# Altium PCB 如意硬件WIFI模块0831.PcbDoc
Units mm, origin at the board's own origin, x right, y up, seen from the top; angles counter-clockwise.
Board outline 47 x 49 mm, 2 copper layers (Top Layer, Bottom Layer); 25 components, 18 nets, 125 pads, 17 vias.
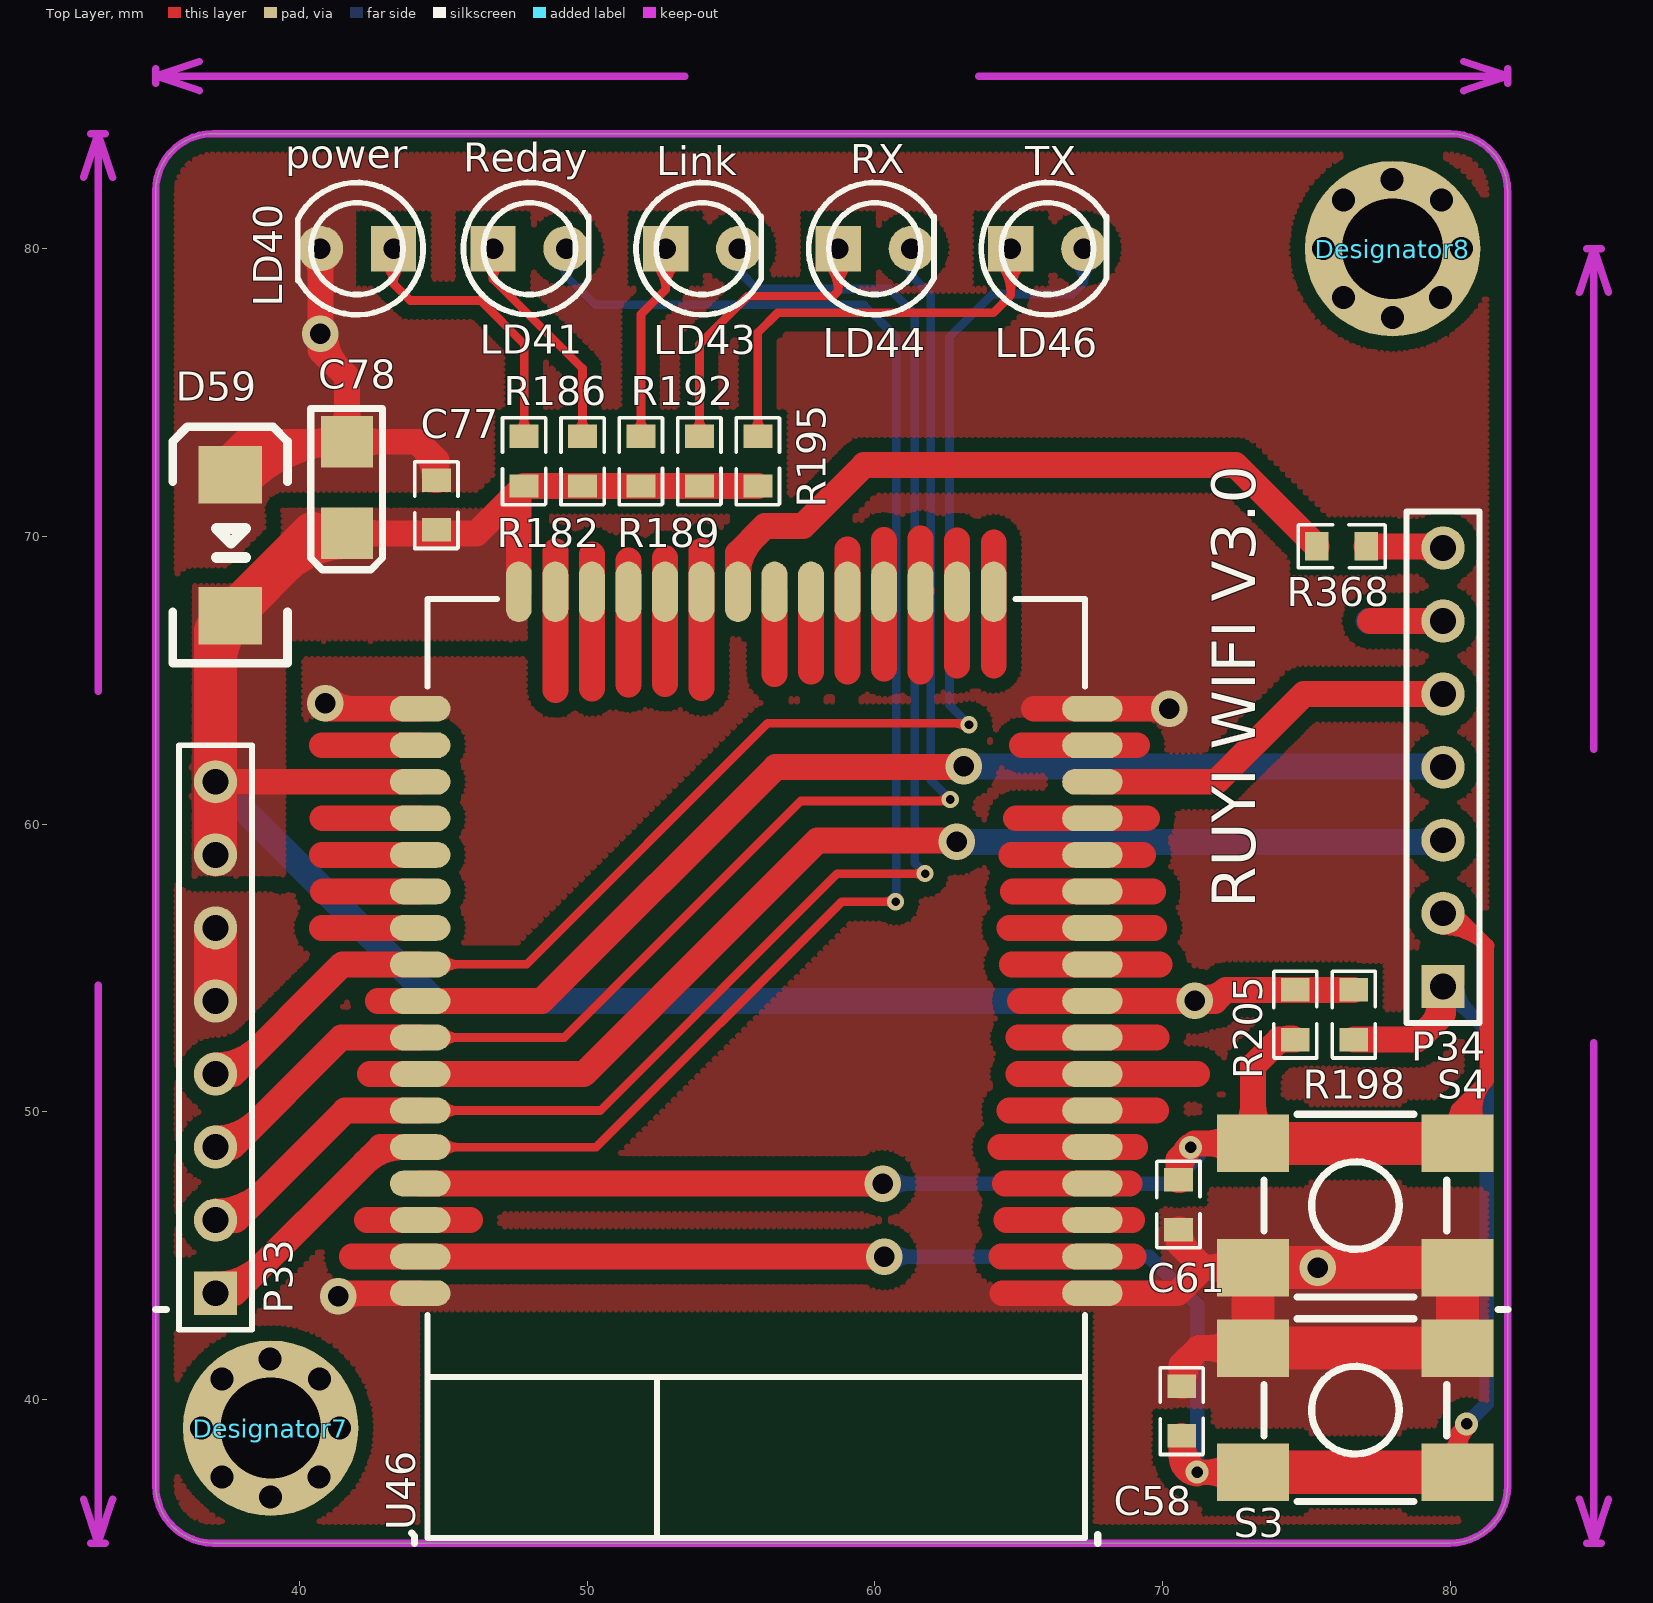
[diagram p0: Top Layer view]
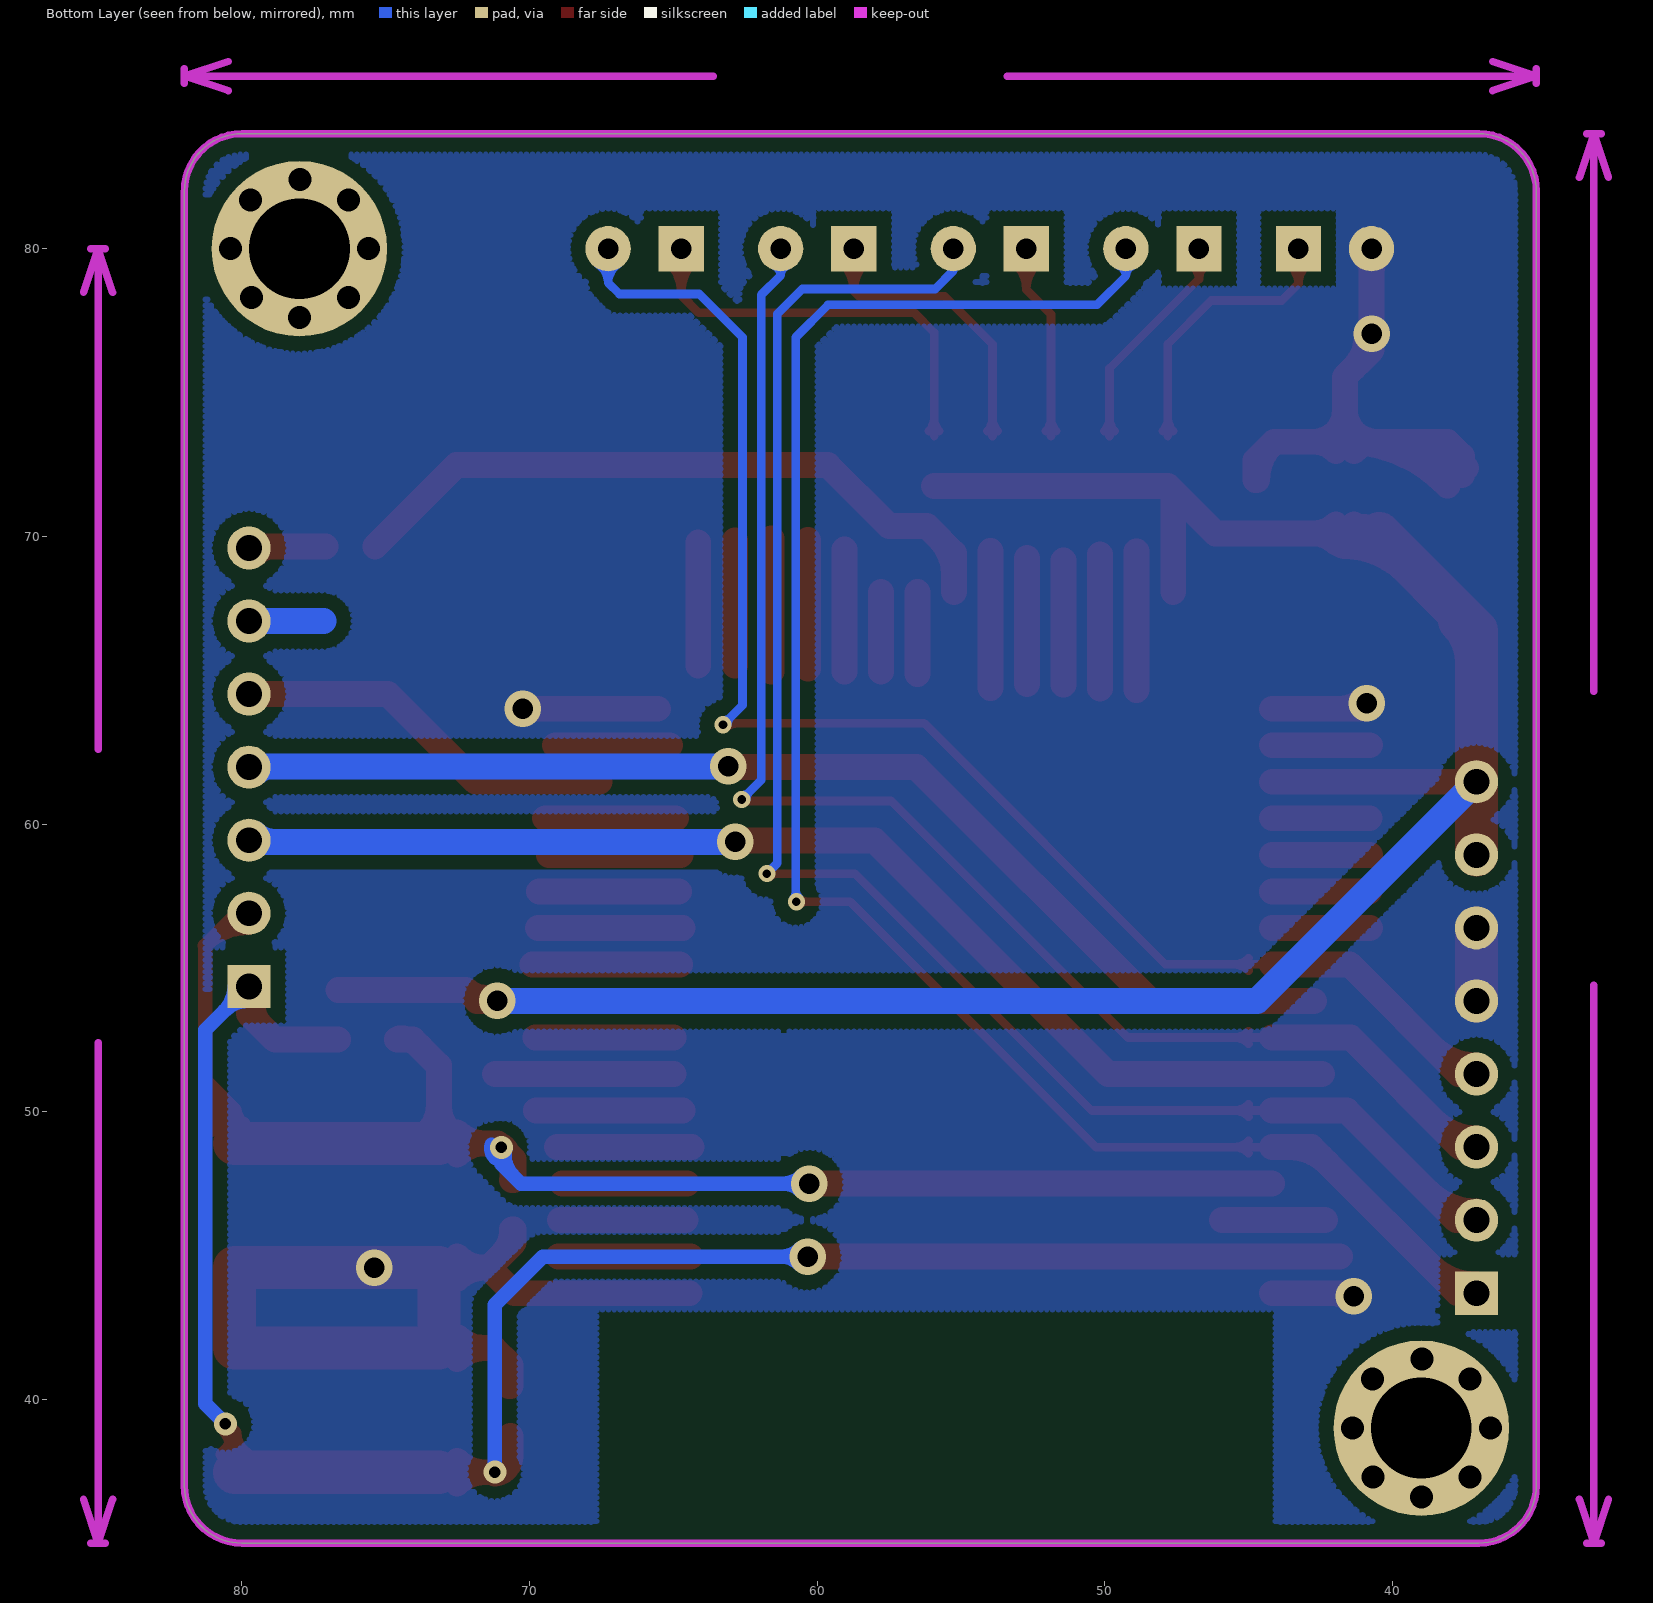
[diagram p1: Bottom Layer view, seen from below]

## Layer stack, top to bottom
Top Layer: signal copper 0.0356
Dielectric: dielectric 0.32, FR-4, Dk 4.8
Bottom Layer: signal copper 0.0356

## Board outline
37,35 cw(c37,37) 35,37 35,82 cw(c37,82) 37,84 80,84 cw(c80,82) 82,82 82,37 cw(c80,37) 80,35

## Design rules (kind name [scope] priority, off if disabled: settings)
Clearance Clearance_1 [InPolygon] p1: gap=0.5
Clearance [All] p2: gap=0.254
ComponentClearance [All] p1: gap=0 collisioncheckmode=3 verticalgap=0 showdistances=FALSE
FabricationTestpoint [(IsPad And (OnTopLayer Or OnBottomLayer))] p1: side=3 testpointundercomponent=TRUE minsize=1.016 maxsize=2.54 preferedsize=1.524 minholesize=0 maxholesize=1.016 preferedholesize=0.813 testpointgrid=0.025 allowsidetop=TRUE allowsidebottom=TRUE usegrid=TRUE gridtolerance=0
PolygonConnect PolygonConnect_1 [IsVia Or IsSMTPin Or IsThruPin vs IsPoly] p1: connectstyle=Direct reliefconductorwidth=0.254 reliefentries=4 polygonreliefangle="90 Angle"
PolygonConnect [All] p2: connectstyle=Relief reliefconductorwidth=0.254 reliefentries=4 polygonreliefangle="90 Angle"
RoutingVias [All] p1: holewidth=0.711 width=1.27 viastyle="Through Hole" minholewidth=0.2 minwidth=0.4 maxholewidth=0.711 maxwidth=1.27
SilkToSilkClearance [All] p1: silktosilkclearance=0
SilkscreenOverComponentPads [All] p1: minsilkscreentomaskgap=0
SolderMaskExpansion [All] p1: expansion=0.102
Width [All] p1: maxlimit=1.5 minlimit=0.3 preferedwidth=0.9
24 further rules are at their usual default settings.

## Components (designator, comment, footprint, x,y, rotation, side; value= is the part's Value field where it differs from the comment)
C58 "0.1uf" 0603C-1 70.612,39.624 r90 top
C61 "0.1uf" 0603C-1 70.612,46.736 r270 top
C77 "1uf" 0603C-1 44.704,71.12 r90 top
C78 "47uf/6.3V" 1206D-S 41.656,70.104 r180 top
D59 "SMAJ5A" SMB 37.592,72.136 r90 top
Designator7 "Comment" Hole-3MM 39,39 r0 top
Designator8 "Comment" Hole-3MM 78,80 r0 top
LD40 "LED" LED_Z1 42,80 r0 top
LD41 "LED" LED_Z1 48,80 r180 top
LD43 "LED" LED_Z1 54,80 r180 top
LD44 "LED" LED_Z1 60,80 r180 top
LD46 "LED" LED_Z1 66,80 r180 top
P33 "Header 8" HDR1X8 37.084,43.688 r90 top
P34 "Header 7" HDR1X7 79.756,54.356 r90 top
R182 "510" 0603R-1 47.752,72.644 r90 top
R186 "510" 0603R-1 49.784,72.644 r90 top
R189 "510" 0603R-1 51.816,72.644 r90 top
R192 "510" 0603R-1 53.848,72.644 r90 top
R195 "510" 0603R-1 55.88,72.644 r90 top
R198 "10K" 0603R-1 76.708,53.34 r270 top
R205 "10K" 0603R-1 74.676,53.34 r270 top
R368 "0" 0603R-1 76.2,69.596 r180 top
S3 "SW-PB" SW_PB4_A1 76.708,39.624 r0 top
S4 "SW-PB" SW_PB4_A1 76.708,46.736 r180 top
U46 "WIFI232-G2" USR-WIFI232-G2 67.564,43.688 r180 top

## Footprints (in the part's own frame and the unit in brackets; to place one, negate y for a bottom-side part, rotate by r counter-clockwise, add the part's x,y. Pads: shape width x height; smd on the part's side, far side on the other; paste and mask are expansions set on the pad)
0603C-1 [mm]
  rect 0.813x1 smd: 1(-0.892,-0.057) 2(0.835,-0.057)
  silkscreen extent -1.54,-0.81 1.47,0.69
0603R-1 [mm]
  rect 0.813x1 smd: 1(-0.892,-0.057) 2(0.835,-0.057)
  silkscreen extent -1.54,-0.81 1.47,0.69
1206D-S [mm]
  rect 1.8x1.8 smd: 1(0,0) 2(0,-3.186)
  silkscreen extent -1.23,-4.34 1.27,1.26
HDR1X7 [mm] "Connector; Header; 7 Position"
  rect 1.5x1.5 hole 0.9: 1(0,0)
  round 1.5 hole 0.9: 2(2.54,0) 3(5.08,0) 4(7.62,0) 5(10.16,0) 6(12.7,0) 7(15.24,0)
  silkscreen extent -1.27,-1.27 16.51,1.27
HDR1X8 [mm] "Connector; Header; 8 Position"
  rect 1.5x1.5 hole 0.9: 1(0,0)
  round 1.5 hole 0.9: 2(2.54,0) 3(5.08,0) 4(7.62,0) 5(10.16,0) 6(12.7,0) 7(15.24,0) 8(17.78,0)
  silkscreen extent -1.27,-1.27 19.05,1.27
Hole-3MM [mm]
  round 6.1 hole 3.5: 0(0,0)
  round 1 hole 0.8: 2(-2.4,0) 3(-0.025,2.4) 4(2.4,0) 5(0,-2.4) 6(-1.7,1.7) 7(1.7,1.7) 8(1.675,-1.7) 9(-1.7,-1.7)
LED_Z1 [mil] "直径3MM二极管"
  rect 62x62 hole 28: 1(50,0)
  round 62 hole 28: 2(-50,0)
  silkscreen extent -81,-91 90,91
SMB [mm]
  rect 2x2.2 smd: 1(0,0) 2(-4.9,0)
  silkscreen extent -6.54,-1.99 1.67,2
SW_PB4_A1 [mm]
  rect 2.5x2 smd: 1(-3.556,2.159) 2(-3.556,-2.159) 3(3.556,-2.159) 4(3.556,2.159)
  silkscreen extent -3.17,-3.17 3.17,3.17, body extent -3.17,-3.17 3.17,3.17, height 6
USR-WIFI232-G2 [mm]
  oval 2.1x0.9 smd: 1(0,0) 2(0,-1.27) 3(0,-2.54) 4(0,-3.81) 5(0,-5.08) 6(0,-6.35) 7(0,-7.62) 8(0,-8.89) 9(0,-10.16) 10(0,-11.43) 11(0,-12.7) 12(0,-13.97) 13(0,-15.24) 14(0,-16.51) 15(0,-17.78) 16(0,-19.05) 17(0,-20.32) 32(23.368,-20.32) 33(23.368,-19.05) 34(23.368,-17.78) 35(23.368,-16.51) 36(23.368,-15.24) 37(23.368,-13.97) 38(23.368,-12.7) 39(23.368,-11.43) 40(23.368,-10.16) 41(23.368,-8.89) 42(23.368,-7.62) 43(23.368,-6.35) 44(23.368,-5.08) 45(23.368,-3.81) 46(23.368,-2.54) 47(23.368,-1.27) 48(23.368,0)
  oval 0.9x2.1 smd: 18(3.429,-24.384) 19(4.699,-24.384) 20(5.969,-24.384) 21(7.239,-24.384) 22(8.509,-24.384) 23(9.779,-24.384) 24(11.049,-24.384) 25(12.319,-24.384) 26(13.589,-24.384) 27(14.859,-24.384) 28(16.129,-24.384) 29(17.399,-24.384) 30(18.669,-24.384) 31(19.939,-24.384)
  silkscreen extent 0.25,-24.13 23.11,8.5

## Part data
C58 C61 C77: library part CAP, "Capacitor"
C78: library part ELECTRO1, "Electrolytic Capacitor"
D59: library part TVS
P33: "Header, 8-Pin"
P34: "Header, 7-Pin"
R182 R186 R189 R192 R195 R198 R205 R368: library part RES-2
S3 S4: "Switch"

## Via types
v1: diameter 1.27, hole 0.711, Top Layer to Bottom Layer, 10 vias
v2: diameter 0.6, hole 0.3, Top Layer to Bottom Layer, 4 vias
v3: diameter 0.8, hole 0.4, Top Layer to Bottom Layer, 3 vias

## Nets (pads, with @x,y where several pads share a name; then routed paths per layer and width w, separated by ;. In a path a pad name is that pad's centre, name@x,y a point inside that pad or via, vN(x,y) a via of type N, cw(c..) or ccw(c..) an arc to the next point about the centre after c; other vN are vias at no path point)
+3.3V: C77.1 C78.1 D59.2 P33.7 P33.8 R182.1 R186.1 R189.1 R192.1 R195.1 R198.1 R205.1 U46.9 U46.31 U46.34 | length 98.8
  Top Layer w0.9: P33.8 U46.34 ; 40.46,70.104 C78.1 46.161,70.104 R182.1@47.625,71.568 ; C78.1@41.338,69.786 ccw(c40.57,69.018) 40.57,70.104 ccw(c40.57,71.19) C78.1@41.338,70.422 ; C78.1@41.974,69.786 cw(c42.742,69.018) 42.742,70.104 cw(c42.742,71.19) C78.1@41.974,70.422 ; U46.31 R182.1@47.625,71.568 ; R195.1 R192.1 R189.1 R186.1 R182.1 R182.1@47.625,71.568 ; 65.048,53.848 U46.9 v1(71.125,53.848) 71.823,53.848 72.207,54.232 ; v1@71.193,54.02 ccw(c71.538,54.901) 72.207,54.232 ; R198.1 R205.1 72.207,54.232
  Top Layer w1.5: P33.7 P33.8 37.084,66.728 40.46,70.104 ; 37.084,65.647 cw(c39.081,65.647) D59.2@37.669,67.059 ; 39.358,69.002 cw(c41.656,66.704) C78.1@41.656,69.954 ; 39.862,69.506 cw(c41.124,68.244) C78.1@41.615,69.96
  Bottom Layer w0.9: P33.8 44.704,53.848 v1(71.125,53.848)
GND: C58.2 C61.2 C77.2 C78.2 D59.1 LD40.2 P33.5 P33.6 S3.1 S3.4 S4.1 S4.4 U46.1 U46.17 U46.32 U46.48 | length 87.9
  Top Layer w0.9: D59.1@37.438,72.377 cw(c39.562,70.363) 39.562,73.29 ; D59.1 37.592,72.792 38.09,73.29 ; D59.1@38.085,72.52 cw(c38.477,72.903) 38.09,73.29 ; D59.1@38.091,71.758 cw(c41.656,68.377) C78.2 ; LD40.2@40.491,79.761 cw(c39.915,79.185) 40.73,79.185 cw(c41.545,79.185) LD40.2@40.969,79.761 ; LD40.2 40.73,76.47 41.656,75.544 C78.2 ; v1@40.883,64.008 U46.32 ; v1@40.91,77.039 ccw(c42.483,76.946) 41.368,75.832 ; v1@41.031,64.331 ccw(c41.81,65.11) 41.81,64.008 ; C78.2@41.338,72.972 ccw(c40.57,72.203) 40.57,73.29 ccw(c40.57,74.376) 41.338,73.608 ccw(c40.57,74.376) 41.656,74.376 ccw(c42.742,74.376) 41.974,73.608 ccw(c42.742,74.376) 42.742,73.29 ccw(c42.742,72.203) C78.2@41.974,72.972 ; v1@41.462,43.688 U46.48 ; v1@41.481,43.444 cw(c42.069,42.856) 42.069,43.688 ; 44.189,73.216 cw(c42.928,71.955) C77.2@44.711,71.955 ; C77.2 44.761,72.644 44.115,73.29 C78.2 ; 64.441,43.688 U46.1 70.534,43.688 71.423,44.577 ; 65.533,64.008 U46.17 v1(70.242,64.008) ; C61.2 70.555,45.445 71.423,44.577 ; C61.2@70.605,45.901 ccw(c71.827,45.901) 70.963,45.037 ; C58.2 70.669,41.194 71.258,41.783 ; C58.2@70.719,40.458 cw(c72.559,40.481) 71.258,41.783 ; S3.1@72.513,41.394 ccw(c71.574,40.455) 71.574,41.783 ccw(c71.574,43.111) S3.1@72.513,42.172 ; S4.4@72.513,44.188 ccw(c71.574,43.249) 71.574,44.577 ccw(c71.574,45.905) S4.4@72.513,44.966 ; S3.1 71.258,41.783 ; S4.4 71.423,44.577 ; 38.09,73.29 C78.2
  Top Layer w1.5: P33.5 P33.6 ; S3.1 S3.4 S4.1 S4.4 S3.1
  other v1: 41.35,43.575 75.4,44.575 40.9,64.2 40.725,77.05
NetLD40_1: LD40.1 R182.2 | length 12.4
  Top Layer w0.3: LD40.1@42.906,79.477 cw(c42.421,78.78) 43.27,78.78 cw(c44.119,78.78) LD40.1@43.634,79.477 ; LD40.1 43.27,78.78 43.85,78.2 46.3,78.2 47.809,76.691 R182.2 ; R182.2@47.628,73.66 ccw(c47.19,74.098) 47.809,74.098 ccw(c48.428,74.098) R182.2@47.99,73.66
NetLD41_1: LD41.1 R186.2 | length 10
  Top Layer w0.3: LD41.1@46.434,79.436 cw(c46.176,78.945) 46.73,78.945 ; LD41.1 46.73,78.945 ; LD41.1@47.026,79.436 ccw(c47.284,78.945) 46.73,78.945 ; R186.2@49.66,73.66 ccw(c49.222,74.098) 49.841,74.098 ccw(c50.46,74.098) R186.2@50.022,73.66 ; R186.2 49.841,75.834 46.73,78.945
NetLD43_1: LD43.1 R189.2 | length 10
  Top Layer w0.3: R189.2@51.692,73.66 ccw(c51.254,74.098) 51.873,74.098 ccw(c52.492,74.098) R189.2@52.054,73.66 ; R189.2 51.873,77.723 52.73,78.58 ; LD43.1@52.306,79.524 cw(c51.467,78.58) 52.73,78.58 ; LD43.1 52.73,78.58 ; LD43.1@53.154,79.524 ccw(c53.993,78.58) 52.73,78.58
NetLD44_1: LD44.1 R192.2 | length 13.5
  Top Layer w0.3: R192.2@53.724,73.66 ccw(c53.286,74.098) 53.905,74.098 ccw(c54.524,74.098) R192.2@54.086,73.66 ; R192.2 53.905,76.68 55.575,78.35 58.55,78.35 58.73,78.53 ; LD44.1@58.294,79.535 cw(c57.354,78.53) 58.73,78.53 ; LD44.1 58.73,78.53 ; LD44.1@59.166,79.535 ccw(c60.106,78.53) 58.73,78.53
NetLD46_1: LD46.1 R195.2 | length 19.2
  Top Layer w0.3: R195.2@55.756,73.66 ccw(c55.318,74.098) 55.937,74.098 ccw(c56.556,74.098) R195.2@56.118,73.66 ; R195.2 55.937,77.087 56.625,77.775 64.125,77.775 64.73,78.38 LD46.1 ; LD46.1@64.279,79.549 cw(c63.191,78.461) 64.73,78.461 cw(c66.269,78.461) LD46.1@65.181,79.549 ; LD46.1@64.491,79.761 cw(c63.915,79.185) 64.73,79.185 cw(c65.545,79.185) LD46.1@64.969,79.761
NetP34_7: P34.7 R368.1 | length 3.3
  Top Layer w0.9: R368.1 P34.7@79.699,69.653 ; 78.894,69.653 cw(c78.894,68.734) P34.7@79.544,69.384
NLINK: LD43.2 P33.2 U46.43 | length 60.4
  Top Layer w0.3: U46.43 50.463,50.038 58.7,58.275 v2(61.75,58.275) ; U46.43@45.008,49.826 cw(c45.52,49.314) 45.52,50.038 cw(c45.52,50.762) U46.43@45.008,50.25 ; v2@61.644,58.169 ccw(c61.388,57.913) 61.388,58.275 ccw(c61.388,58.637) v2@61.644,58.381
  Top Layer w0.9: P33.2 37.778,46.228 41.588,50.038 U46.43 ; P33.2@37.084,46.528 ccw(c37.084,48.928) 38.781,47.231
  Bottom Layer w0.3: LD43.2 55.27,79.23 55.9,78.6 60.525,78.6 61.392,77.733 61.392,58.633 v2(61.75,58.275)
NREADY: LD41.2 P33.1 U46.44 | length 70
  Top Layer w0.3: U46.44 50.318,48.768 58.85,57.3 v2(60.725,57.3) ; U46.44@45.008,48.556 cw(c45.52,48.044) 45.52,48.768 cw(c45.52,49.492) U46.44@45.008,48.98 ; v2@60.619,57.194 ccw(c60.363,56.938) 60.363,57.3 ccw(c60.363,57.662) v2@60.619,57.406
  Top Layer w0.9: P33.1 37.738,43.688 42.818,48.768 U46.44 ; P33.1@37.084,43.988 ccw(c37.084,46.291) 38.713,44.663 ; 42.268,48.218 cw(c43.596,46.89) 43.596,48.768 ccw(c43.401,47.407) 42.429,48.379
  Bottom Layer w0.3: LD41.2@49.031,79.409 cw(c48.888,79.055) 49.27,79.055 ; LD41.2 49.27,79.055 ; LD41.2@49.509,79.409 ccw(c49.652,79.055) 49.27,79.055 ; v2@60.619,57.406 ccw(c60.303,57.722) 60.75,57.722 ; v2@60.75,57.3 60.75,76.925 59.629,78.046 55.671,78.046 55.667,78.05 50.275,78.05 49.27,79.055 ; 60.75,57.602 ccw(c61.027,57.602) v2@60.831,57.406
NRELOAD: C61.1 P34.2 R205.2 S4.2 S4.3 U46.45 | length 71.4
  Top Layer w0.3: P34.2 P34.2@80.154,56.896
  Top Layer w0.5: P34.2@79.756,56.396 cw(c79.756,54.228) 81.289,55.761 ; S4.2@79.951,49.577 ccw(c79.728,50.064) 80.264,50.064 ; P34.2@80.154,56.896 81.275,55.775 81.275,51.075 ; S4.2 80.264,50.064 ; S4.2@80.31,48.751 cw(c81.254,49.419) 80.436,50.236 ; S4.2@80.577,49.577 cw(c80.8,50.064) 80.264,50.064 ; S4.2@80.718,49.039 cw(c81.745,49.766) 80.856,50.656 ; S4.2@81.126,49.328 cw(c82.237,50.113) 81.275,51.075 ; 80.264,50.064 81.275,51.075
  Top Layer w0.9: U46.45 v1(60.273,47.498) ; C61.1 70.555,48.33 v3(70.984,48.759) ; C61.1@70.555,47.844 cw(c71.898,47.844) v3@70.948,48.794 ; C61.1@70.605,47.622 cw(c71.93,47.813) v3(70.984,48.759) ; S4.3@72.513,48.506 ccw(c71.574,47.567) 71.574,48.895 ccw(c71.574,50.223) S4.3@72.513,49.284 ; S4.3@72.763,49.284 ccw(c71.824,50.223) 73.152,50.223 ccw(c74.48,50.223) S4.3@73.541,49.284 ; 73.797,52.247 cw(c74.525,51.518) R205.2@74.525,52.549 ; 73.82,52.27 cw(c74.494,51.595) R205.2@74.527,52.549 ; R205.2 74.055,52.505 73.152,51.602 S4.3 71.12,48.895 v3(70.984,48.759)
  Top Layer w1.5: S4.3 S4.2
  Bottom Layer w0.5: v1(60.273,47.498) 70.298,47.498 70.984,48.184 v3(70.984,48.759) ; v1@60.545,47.226 cw(c61.202,46.569) 61.202,47.498 cw(c61.202,48.427) v1@60.545,47.77 ; 70.586,47.786 ccw(c69.897,48.474) v3@70.839,48.721 ; 71.202,48.402 ccw(c70.873,48.73) v3@71.322,48.848
NRESET: C58.1 P34.1 R198.2 S3.2 S3.3 U46.47 | length 80.7
  Top Layer w0.5: S3.3@79.858,38.096 ccw(c79.381,38.839) 80.264,38.839 ; S3.3 80.264,38.839 ; S3.3@80.264,38.037 cw(c81.688,38.037) v3@80.681,39.044 ; v3(80.575,39.15) 80.264,38.839 ; S3.3@80.67,38.096 cw(c81.147,38.839) 80.264,38.839
  Top Layer w0.9: 41.833,44.958 U46.47 v1(60.333,44.958) ; C58.1@70.669,38.65 ccw(c72.395,38.65) v3@71.175,37.43 ; C58.1 70.669,38.006 ; v3@71.205,37.415 cw(c71.263,38.006) 70.669,38.006 ; S3.2@72.513,37.076 ccw(c71.574,36.137) 71.574,37.465 ccw(c71.574,38.793) S3.2@72.513,37.854 ; S3.2 v3(71.21,37.465) 70.669,38.006 ; R198.2 78.855,52.505 79.756,53.406 P34.1 ; 79.33,52.98 ccw(c78.608,53.702) P34.1@79.495,54.208
  Top Layer w1.5: S3.2 S3.3
  Bottom Layer w0.5: v1(60.333,44.958) 69.542,44.958 71.21,43.29 v3(71.21,37.465) ; v1@60.605,44.686 cw(c61.262,44.029) 61.262,44.958 cw(c61.262,45.887) v1@60.605,45.23 ; P34.1@79.756,53.856 cw(c79.756,52.649) 80.61,53.502 cw(c81.463,54.356) P34.1@80.256,54.356 ; P34.1 81.275,52.837 81.275,39.85 v3(80.575,39.15)
PWR_SW: R368.2 U46.25 | length 25.3
  Top Layer w0.9: U46.25 55.245,69.42 56.188,70.362 57.512,70.362 59.625,72.475 72.543,72.475 R368.2 ; U46.25@55.245,68.672 cw(c57.051,68.672) 55.774,69.949
WIFI_CTS: P34.3 U46.42 | length 41.1
  Top Layer w0.9: 42.458,51.308 U46.42 49.883,51.308 58,59.425 v1@62.65,59.425
  Bottom Layer w0.9: v1(62.85,59.375) P34.3@79.695,59.375 ; 78.884,59.375 ccw(c78.884,60.308) P34.3@79.544,59.648
WIFI_RTS: P34.4 U46.40 | length 40.6
  Top Layer w0.9: 42.723,53.848 U46.40 48.423,53.848 56.55,61.975 v1@62.65,61.975
  Bottom Layer w0.9: v1(63.1,62) P34.4@79.732,62 ; 78.974,62 cw(c78.974,61.194) P34.4@79.544,61.764
WIFI_RX: LD44.2 P33.3 U46.41 | length 55.7
  Top Layer w0.3: U46.41 49.203,52.578 57.425,60.8 v2@62.625,60.8 ; U46.41@45.008,52.366 cw(c45.52,51.854) 45.52,52.578 cw(c45.52,53.302) U46.41@45.008,52.79 ; 62.142,60.8 ccw(c62.142,61.333) v2@62.519,60.956
  Top Layer w0.9: P33.3 37.643,48.768 41.453,52.578 U46.41 ; P33.3@37.084,49.068 ccw(c37.084,51.142) 38.55,49.675
  Bottom Layer w0.3: LD44.2 61.27,79.072 ; v2@62.475,60.85 ccw(c62.113,60.85) 62.369,61.106 ccw(c62.625,61.362) v2@62.625,61 ; v2(62.625,60.85) 61.946,61.529 61.946,78.396 61.27,79.072 ; 61.27,79.072 cw(c61.627,79.072) 61.499,79.405 ccw(c61.627,79.072) 61.27,79.072 ; 61.27,79.072 ccw(c60.913,79.072) 61.041,79.405 cw(c60.913,79.072) 61.27,79.072
WIFI_TX: LD46.2 P33.4 U46.39 | length 57
  Top Layer w0.3: U46.39 47.893,55.118 56.275,63.5 v2@63.275,63.5 ; U46.39@45.008,54.906 cw(c45.52,54.394) 45.52,55.118 cw(c45.52,55.842) U46.39@45.008,55.33 ; 62.792,63.5 cw(c62.792,62.967) v2@63.169,63.344
  Top Layer w0.9: P33.4 37.683,51.308 41.493,55.118 U46.39 ; P33.4@37.084,51.608 ccw(c37.084,53.778) 38.619,52.244
  Bottom Layer w0.3: v2@63.125,63.45 ccw(c62.763,63.45) 63.019,63.706 ccw(c63.275,63.962) v2@63.275,63.6 ; v2(63.275,63.45) 62.6,64.125 62.6,76.925 64.1,78.425 66.875,78.425 67.27,78.82 ; LD46.2@66.921,79.467 cw(c66.497,78.82) 67.27,78.82 ; LD46.2 67.27,78.82 ; LD46.2@67.619,79.467 ccw(c68.043,78.82) 67.27,78.82
WPS: P34.5 U46.15 | length 13.5
  Top Layer w0.9: U46.15 71.868,61.468 74.916,64.516 P34.5
pads on no net: Designator7.0 Designator7.2 Designator7.3 Designator7.4 Designator7.5 Designator7.6 Designator7.7 Designator7.8 Designator7.9 Designator8.0 Designator8.2 Designator8.3 Designator8.4 Designator8.5 Designator8.6 Designator8.7 Designator8.8 Designator8.9 P34.6 U46.2 U46.3 U46.4 U46.5 U46.6 U46.7 U46.8 U46.10 U46.11 U46.12 U46.13 U46.14 U46.16 U46.18 U46.19 U46.20 U46.21 U46.22 U46.23 U46.24 U46.26 U46.27 U46.28 U46.29 U46.30 U46.33 U46.35 U46.36 U46.37 U46.38 U46.46
copper on no net: | length 138.5
  Top Layer w0.9: 40.778,58.928 44.196,58.928 ; 40.787,56.388 44.196,56.388 ; 40.788,62.738 44.196,62.738 ; 40.802,60.198 44.196,60.198 ; 40.817,57.658 44.196,57.658 ; 42.353,46.228 44.196,46.228 45.922,46.228 ; 48.895,64.655 48.895,68.072 48.895,69.48 ; 50.165,64.715 50.165,68.072 50.165,69.365 ; 51.435,64.84 51.435,68.072 51.435,69.165 ; 52.705,64.87 52.705,68.072 52.705,69.245 ; 53.975,64.725 53.975,68.072 53.975,69.5 ; 56.515,65.215 56.515,68.072 ; 57.785,65.291 57.785,68.072 ; 59.055,65.305 59.055,68.072 59.055,69.545 ; 60.325,65.4 60.325,68.072 60.325,69.875 ; 61.595,65.305 61.595,68.072 ; 61.595,69.93 61.595,68.072 ; 61.625,68.102 61.595,68.072 ; 62.865,65.51 62.865,68.072 62.865,69.86 ; 64.135,65.515 64.135,68.072 64.135,69.79 ; 64.368,48.768 67.564,48.768 69.057,48.768 ; 64.408,44.958 67.564,44.958 68.992,44.958 ; 64.527,47.498 67.564,47.498 68.852,47.498 ; 64.572,46.228 67.564,46.228 68.953,46.228 ; 64.687,50.038 67.564,50.038 69.787,50.038 ; 64.688,56.388 67.564,56.388 69.713,56.388 ; 64.753,58.928 67.564,58.928 69.328,58.928 ; 64.768,55.118 67.564,55.118 69.893,55.118 ; 64.808,57.658 67.564,57.658 69.667,57.658 ; 64.902,60.198 67.564,60.198 69.473,60.198 ; 64.992,51.308 67.564,51.308 71.208,51.308 ; 64.997,52.578 67.564,52.578 69.797,52.578 ; 65.113,62.738 67.564,62.738 69.113,62.738 ; 77.219,67.056 79.756,67.056
  Bottom Layer w0.9: 77.169,67.056 79.756,67.056

## Polygon pours and split planes (outlines as drawn)
GND on Top Layer "Top Layer-No Net" (hatched 90Degree grid 0 track 0.203, pour order 1000): 35,83.875 35,43.125 82,43.125 81.875,43.25 81.875,83.8
+3.3V on Top Layer "Top Layer-No Net" (hatched 90Degree grid 0 track 0.203, pour order 1000): 36.325,68.275 36.35,68.25 36.35,58.275 39.25,58.275 39.35,58.175 39.45,58.275 39.45,68.275 36.325,68.275
+3.3V on Top Layer "Top Layer-No Net" (hatched 90Degree grid 0 track 0.203, pour order 1001): 39.425,70.9 39.45,70.875 39.45,66.45 47.8,66.45 47.9,66.548 47.875,66.573 47.875,70.9 39.425,70.9
GND on Top Layer "Top Layer-No Net" (hatched 90Degree grid 0 track 0.203, pour order 1003): 35,43.125 35.074,43.048 35.074,35.077 44.026,35.077 44.1,35 44.1,43.125 35,43.125
GND on Top Layer "Top Layer-No Net" (hatched 90Degree grid 0 track 0.203, pour order 1004): 67.675,43.125 67.675,35.15 81.826,35.15 81.85,35.175 81.85,43.125 67.699,43.125
GND on Bottom Layer "Top Layer-No Net" (hatched 90Degree grid 0 track 0.203, pour order 1001): 35.125,83.875 35.125,43.25 35.275,43.1 35.3,43.125 82,43.125 82,46.375 81.975,46.4 81.825,46.55 81.825,83.9
GND on Bottom Layer "Top Layer-No Net" (hatched 90Degree grid 0 track 0.203, pour order 1006): 35,43 35.074,42.925 35.074,35.05 44.026,35.05 44.075,35 44.075,43 35.025,43 35,42.975
GND on Bottom Layer "Top Layer-No Net" (hatched 90Degree grid 0 track 0.203, pour order 1007): 67.675,43.125 67.675,35 67.724,35.05 81.926,35.05 81.926,43.05 82,43.125 67.65,43.125

## Keep-outs
Keep-Out Layer:
  lines w0.254: 32.492,36.524 33,35 ; 32.492,82.476 33,84 ; 32.746,35 33.254,35 ; 32.746,84 33.254,84 ; 33,54.396 33,35 ; 33,64.604 33,84 ; 33.508,36.524 33,35 ; 33.508,82.476 33,84 ; 35,85.746 35,86.254 ; 36.524,85.492 35,86 ; 36.524,86.508 35,86 ; 53.396,86 35,86 ; 63.604,86 82,86 ; 80.476,85.492 82,86 ; 80.476,86.508 82,86 ; 82,85.746 82,86.254 ; 84.492,36.524 85,35 ; 84.492,78.476 85,80 ; 84.746,35 85.254,35 ; 84.746,80 85.254,80 ; 85,52.396 85,35 ; 85,62.604 85,80 ; 85.508,36.524 85,35 ; 85.508,78.476 85,80 ; 35,37 ccw(c37,37) 37,35 80,35 ccw(c80,37) 82,37 82,82 ccw(c80,82) 80,84 37,84 ccw(c37,82) 35,82 35,37
  text "47 (mm)" at 53.65,85.086 h1.52
  text "49 (mm)" at 33.914,54.65 h1.52 r90
  text "45 (mm)" at 85.914,52.65 h1.52 r90

## Silkscreen, mask and mechanical layers (free items; w line width, h text height)
Top Overlay:
  lines w0.254: 35,43.125 35.375,43.125 ; 43.9,35.35 44,35.25 44,35 ; 67.75,35 67.75,35.3 ; 81.675,43.125 82,43.125
  text "power" at 39.5,82.8 h1
  text "Reday" at 45.7,82.675 h1
  text "RX" at 59.15,82.625 h1
  text "Link" at 52.4,82.55 h1
  text "TX" at 65.225,82.55 h1
  text "RUYI WIFI V3.0" at 73.225,57.075 h1.52 r90